# Altium PCB B5PLMF_MAR_HF_B9.PcbDoc
Units mm, origin at the board's own origin, x right, y up, seen from the top; angles counter-clockwise.
Board outline 90.17 x 78.5 mm, 2 copper layers (Top Layer, Bottom Layer), stack 1.671 mm thick; 35 components, 50 nets, 217 pads, 14 vias.
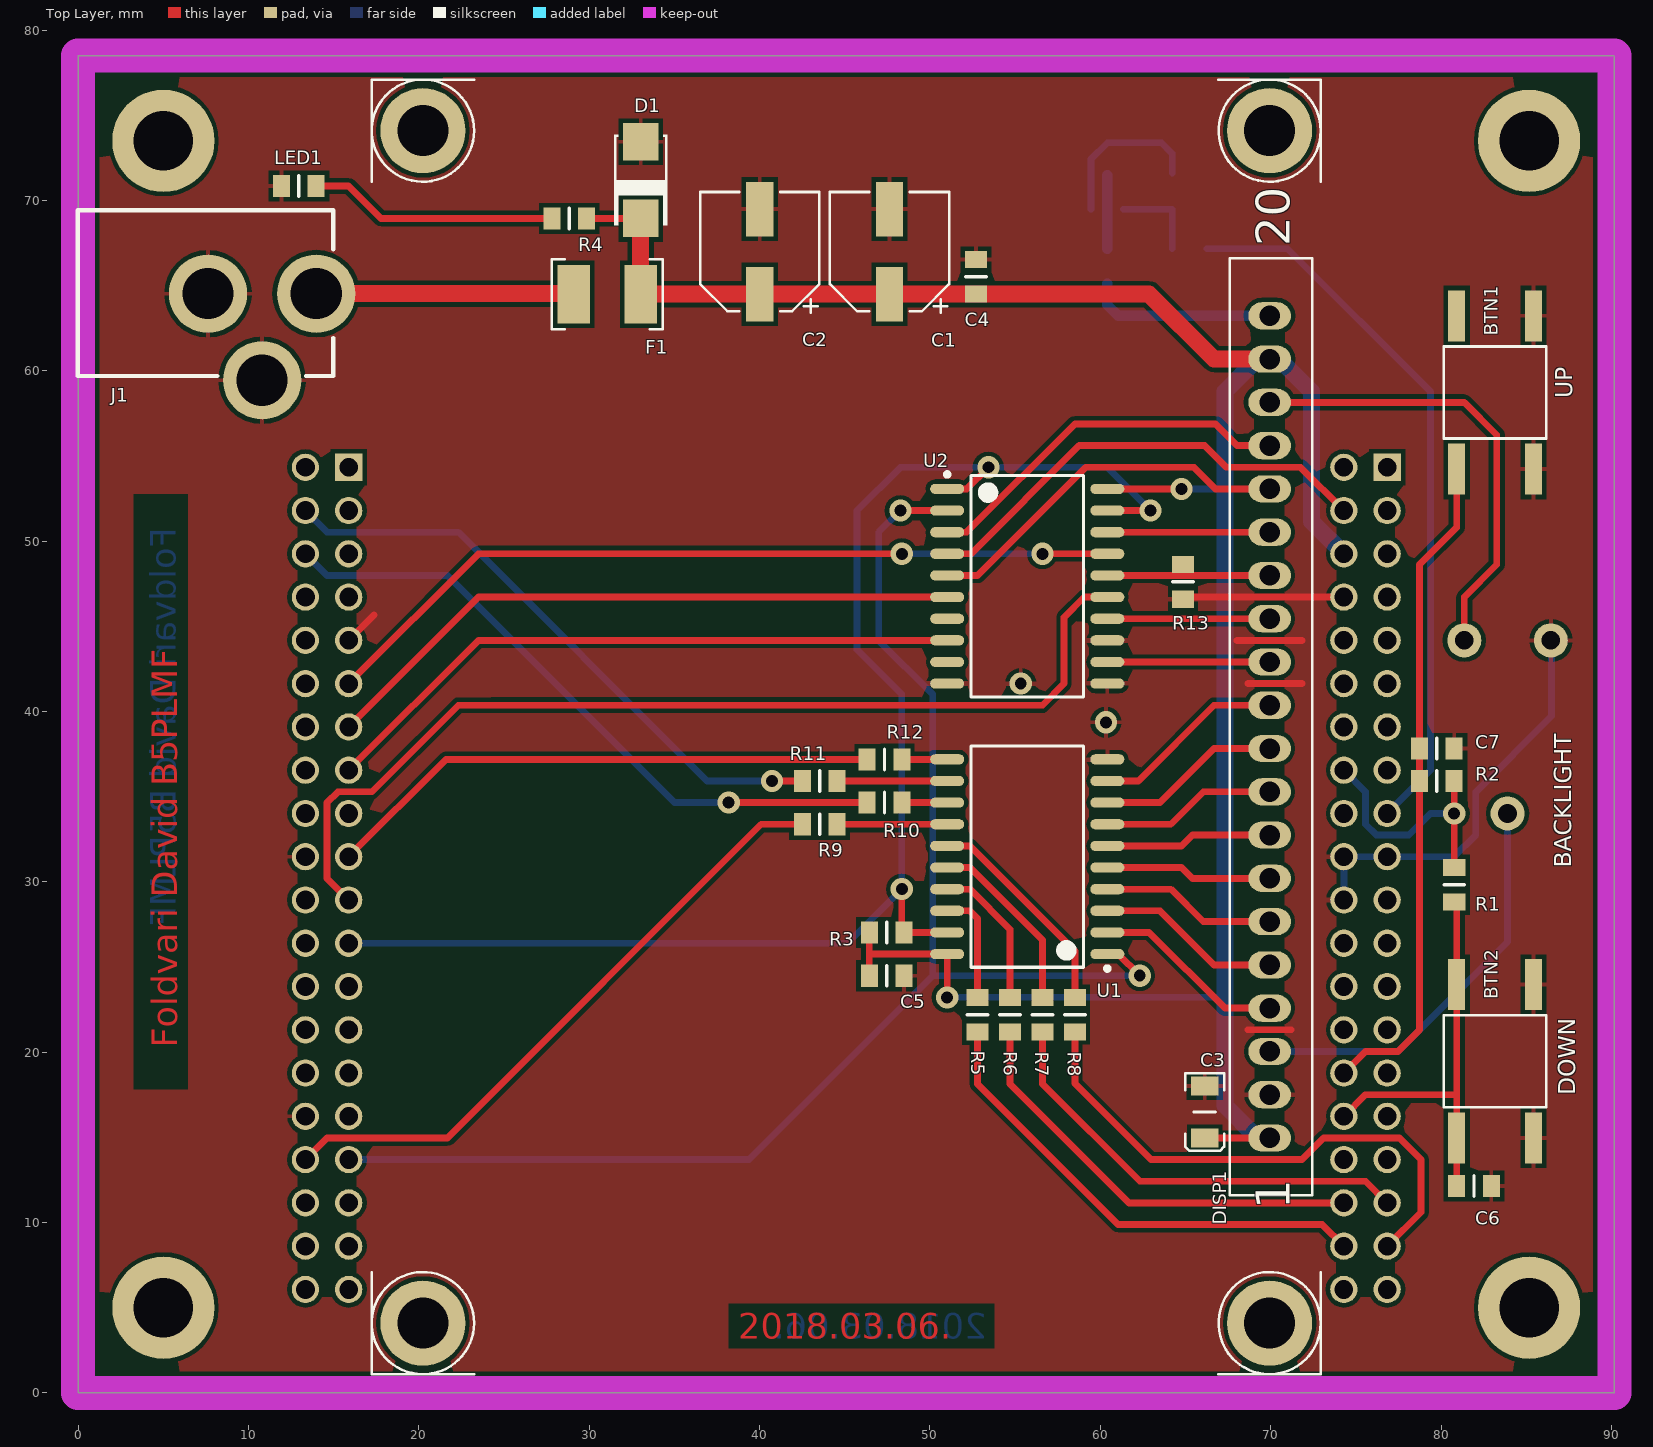
[diagram p0: Top Layer view]
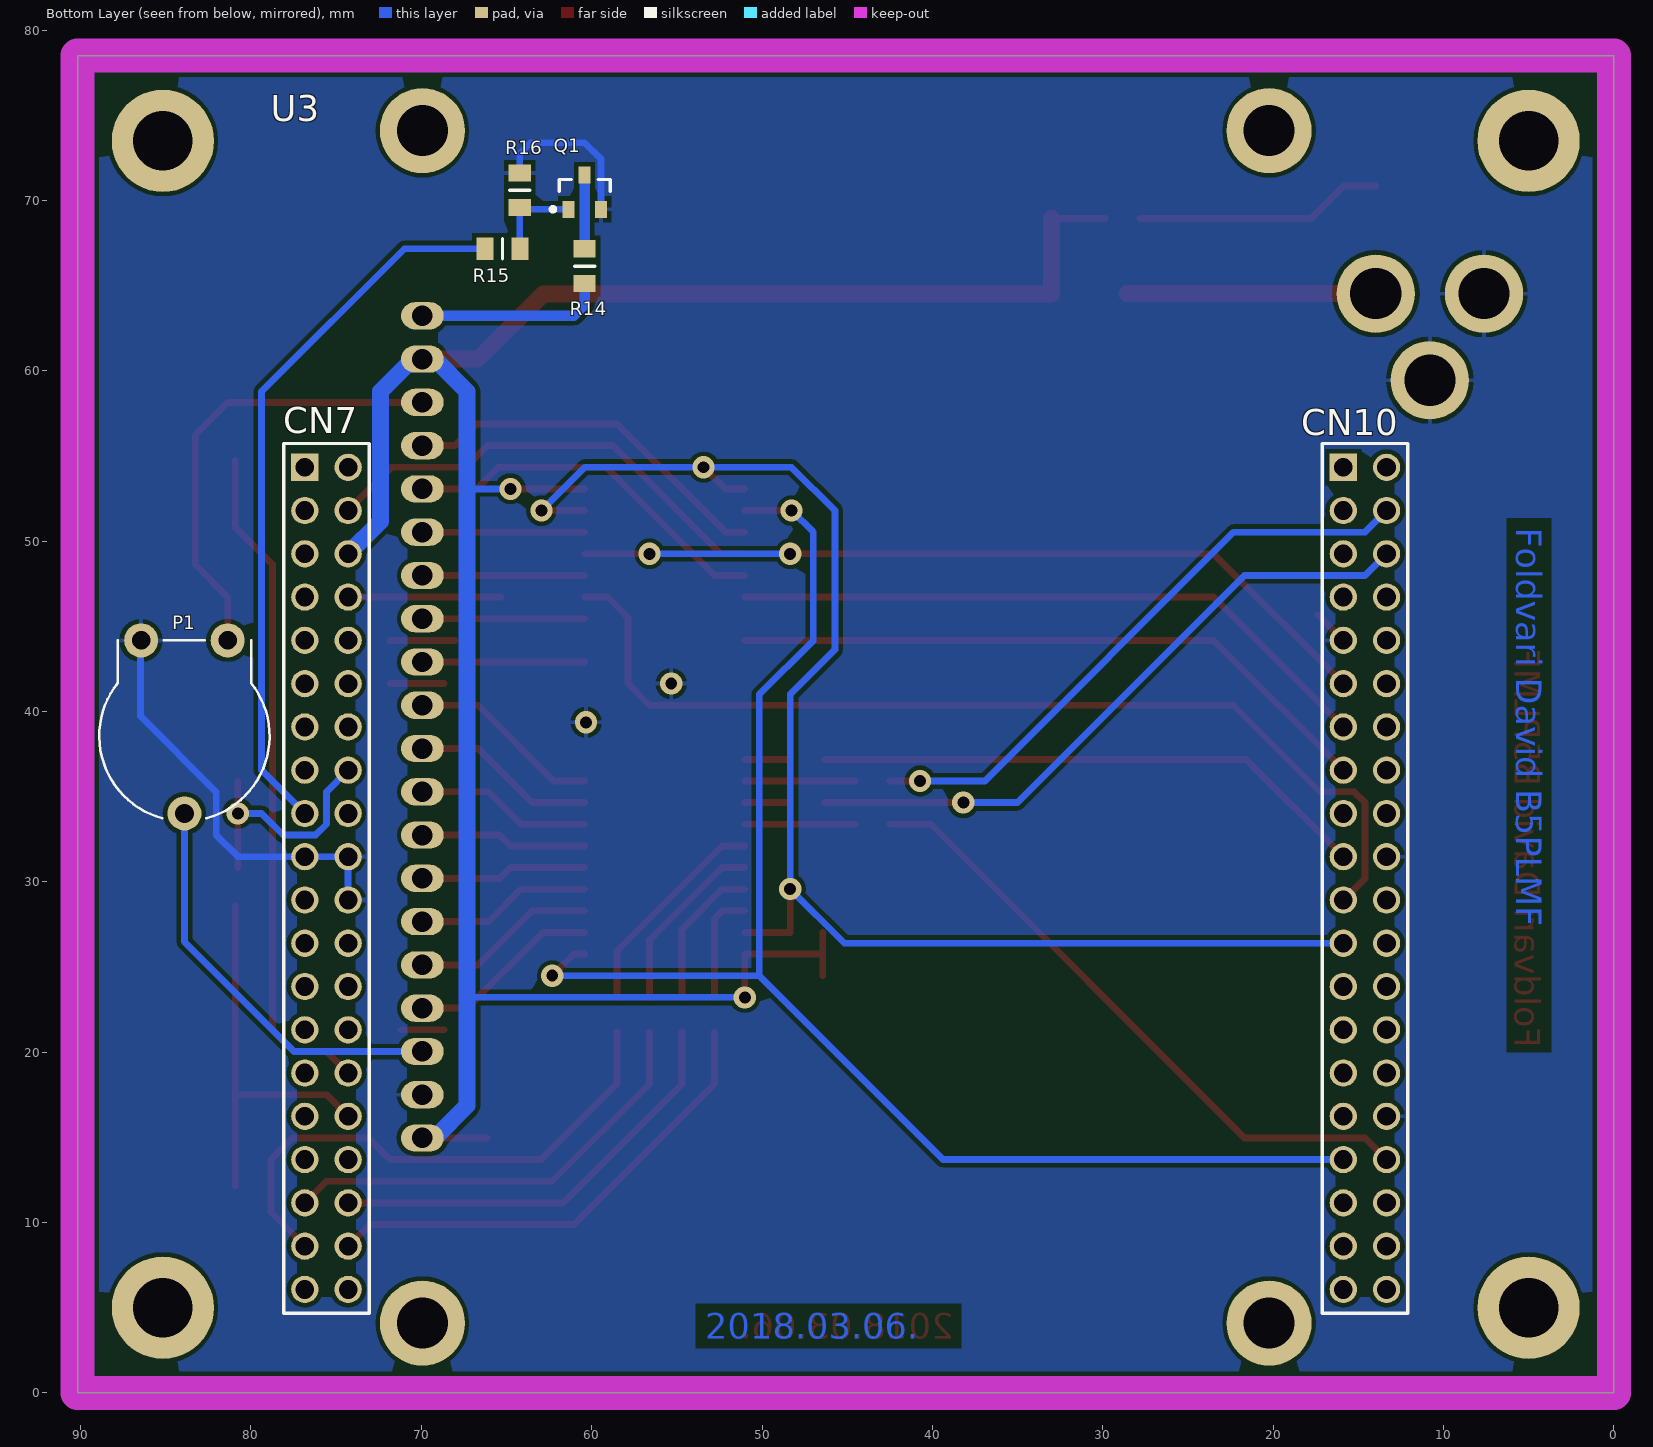
[diagram p1: Bottom Layer view, seen from below]

## Layer stack, top to bottom
Top Solder: solder mask 0.0102, Solder Resist, Dk 3.5
Top Layer: signal copper 0.0356
Dielectric 1: dielectric 1.6, FR-4, Dk 4.8
Bottom Layer: signal copper 0.0356
Bottom Solder: solder mask 0.0102, Solder Resist, Dk 3.5

## Board outline
0,0 0,78.5 90.17,78.5 90.17,0

## Design rules (kind name [scope] priority, off if disabled: settings)
Clearance [All] p1: gap=0.254 ignorepadtopadclearanceinfootprint=FALSE except(0: Arc-Hole Track-Hole SMDPad-Hole THPad-Hole Via-Hole Fill-Hole Poly-Hole Region-Hole Text-Hole)
HoleSize [All] p1: absolutevalues=TRUE maxlimit=4 minlimit=0.025 maxpercent=80.000 minpercent=20.000
PolygonConnect [All] p1: connectstyle=Relief reliefconductorwidth=0.254 reliefentries=4 polygonreliefangle="90 Angle" airgapwidth=0.254
RoutingVias [All] p1: holewidth=0.711 width=1.27 viastyle="Through Hole" minholewidth=0.711 minwidth=1.27 maxholewidth=0.711 maxwidth=1.27
SolderMaskExpansion [All] p1: expansion=0.102
Width [All] p1: maxlimit=10 minlimit=0.254 preferedwidth=0.4 minimp=50.000000 maximp=50.000000 favimp=50.000000
29 further rules are at their usual default settings.

## Classes and differential pairs
net class D[0..7]: D0 D1 D2 D3 D4 D5 D6 D7

## Components (designator, comment, footprint, x,y, rotation, side; value= is the part's Value field where it differs from the comment)
BTN1 "UP" PBUTTON_SMD 83.17,58.73 r90 top locked
BTN2 "DOWN" PBUTTON_SMD 83.17,19.47 r90 top locked
C1 "100u" "D8 ELKO" 47.625,67 r270 top
C2 "100u" "D8 ELKO" 40.005,67 r270 top
C3 "10u" "CAP 1210" 66.125,18.018 r270 top
C4 "100n" "CAP 0805" 52.705,65.516 r270 top
C5 "100n" "CAP 0805" 47.456,24.495 r180 top
C6 "100n" "CAP 0805" 81.936,12.155 r180 top
C7 "100n" "CAP 0805" 79.756,37.83 r180 top
D1 "6.7V" DO-214AC 33.02,71.195 r270 top
DISP1 "64x128 GLCD" 64128Q 46.085,39.1 r90 top locked
F1 "500mA" FUSE1812 31.052,64.5 r0 top
J1 "DC IN 7-12V" "DC POWER CONNECTOR" 13.97,64.53 r90 top locked
LED1 "GREEN" "LED 0805G" 12.954,70.85 r180 top
P1 "10k" PT10 83.905,39.1 r0 bottom locked
Q1 "PMBF170" SOT23 60.41,70.485 r180 bottom
R1 "10k" "RES 0805" 80.772,29.829 r90 top
R2 "10k" "RES 0805" 79.756,35.925 r0 top
R3 "100k" "RES 0805" 47.456,27.035 r180 top
R4 "470R" "RES 0805" 28.829,68.945 r0 top
R5 "1k" "RES 0805" 52.79,22.209 r270 top
R6 "1k" "RES 0805" 54.695,22.209 r270 top
R7 "1k" "RES 0805" 56.6,22.209 r270 top
R8 "1k" "RES 0805" 58.505,22.209 r270 top
R9 "1k" "RES 0805" 43.519,33.385 r180 top
R10 "1k" "RES 0805" 47.329,34.655 r180 top
R11 "1k" "RES 0805" 43.519,35.925 r180 top
R12 "1k" "RES 0805" 47.329,37.195 r180 top
R13 "10k" "RES 0805" 64.855,47.609 r90 top
R14 "33R" "RES 0805" 60.41,66.151 r270 bottom
R15 "4k7" "RES 0805" 65.236,67.167 r0 bottom
R16 "10k" "RES 0805" 64.22,70.596 r270 bottom
U1 "74HCT245D" SO20 55.71,31.48 r180 top
U2 "74HCT244D" SO20 55.71,47.355 r0 top locked
U3 "NUCLEO-F446RE" STM32F4xx_Nucleo 45.085,30.21 r180 bottom locked value="STM32F4 NUCLEO"

## Footprints (in the part's own frame and the unit in brackets; to place one, negate y for a bottom-side part, rotate by r counter-clockwise, add the part's x,y. Pads: shape width x height; smd on the part's side, far side on the other; paste and mask are expansions set on the pad)
64128Q [mm] "64x128 pixel graphical LCD display"
  oval 1.6x2.5 hole 1.2: 1(-24.13,-23.85) 2(-21.59,-23.85) 3(-19.05,-23.85) 4(-16.51,-23.85) 5(-13.97,-23.85) 6(-11.43,-23.85) 7(-8.89,-23.85) 8(-6.35,-23.85) 9(-3.81,-23.85) 10(-1.27,-23.85) 11(1.27,-23.85) 12(3.81,-23.85) 13(6.35,-23.85) 14(8.89,-23.85) 15(11.43,-23.85) 16(13.97,-23.85) 17(16.51,-23.85) 18(19.05,-23.85) 19(21.59,-23.85) 20(24.13,-23.85)
  round 5 hole 3: ""(-35,-23.85) ""(-35,25.85) ""(35,-23.85) ""(35,25.85)
  silkscreen extent -38,-26.85 38,28.85, body extent -38,-26.85 38,28.85, height 15.9
"CAP 0805" [mm] "0805 CAPACITOR"
  rect 1x1.3 smd: 1(-1.016,0) 2(1.016,0)
  silkscreen extent 0,-0.6 0,0.6, body extent -1,-0.64 1,0.62, height 0.6
"CAP 1210" [mm] "POLARIZED CAPACITOR"
  rect 1.1x1.6 smd: 1(3.048,0) 2(0,0)
  silkscreen extent -0.76,-1.14 3.81,1.14, body extent -0.17,-0.8 3.22,0.8, height 1.65
"D8 ELKO" [mm] "D8 size electrolit capacitor 6.3mmx7.7mm"
  rect 3.2x1.6 smd: 1(2.5,0) 2(-2.5,0)
  silkscreen extent -3.5,-3.5 3.6,3.5, body extent -3.5,-3.3 3.5,3.3, height 7.7
"DC POWER CONNECTOR" [mm] "DC POWER CONNECTOR 5.5/2.1/9.5mm"
  round 4.6 hole 3: 1(0,0) 2(0,6.35) 3(-5.08,3.175)
  silkscreen extent -4.84,-1 4.9,14, body extent -4.84,-0.78 4.64,13.7, height 11.18
DO-214AC [mm] "SMA DO-214AC"
  rect 2.2x2.1 smd: 1(-2.25,0) 2(2.25,0)
  silkscreen extent -2.67,-1.58 2.67,1.58, body extent -2.6,-1.3 2.6,1.3, height 2.42
FUSE1812 [mil] "Multifuse"
  rect 75x135 smd: 1(-77.5,0) 2(77.5,0)
  silkscreen extent -128,-81 128,81, body extent -93,-67 93,67, height 53
"LED 0805G" [mm] "0805 GREEN LED"
  rect 1x1.3 smd: 1(-1.016,0) 2(1.016,0)
  silkscreen extent 0,-0.6 0,0.6, body extent -1.01,-0.62 1.01,0.63, height 1.1
PBUTTON_SMD [mm]
  rect 3x1 smd: 1(-4.5,-2.25) 1(4.5,-2.25) 2(-4.5,2.25) 2(4.5,2.25)
  silkscreen extent -2.7,-3 2.7,3, body extent -5,-3 5,3, height 4.95
PT10 [mm] "10mm horizontal potentiometer"
  round 2 hole 1.1: 1(-2.54,-5.08) 2(2.54,-5.08) 3(0,5.08)
  silkscreen extent -5,-5.08 5,5.36, body extent -5.15,-5.07 5.15,5.53, height 6.26
"RES 0805" [mm] "0805 Resistor"
  rect 1x1.3 smd: 1(-1.016,0) 2(1.016,0)
  silkscreen extent 0,-0.6 0,0.6, body extent -1,-0.64 1,0.62, height 0.6
SO20 [mm]
  oval 2x0.6 smd: 1(-4.7,5.715) 2(-4.7,4.445) 3(-4.7,3.175) 4(-4.7,1.905) 5(-4.7,0.635) 6(-4.7,-0.635) 7(-4.7,-1.905) 8(-4.7,-3.175) 9(-4.7,-4.445) 10(-4.7,-5.715) 11(4.7,-5.715) 12(4.7,-4.445) 13(4.7,-3.175) 14(4.7,-1.905) 15(4.7,-0.635) 16(4.7,0.635) 17(4.7,1.905) 18(4.7,3.175) 19(4.7,4.445) 20(4.7,5.715)
  silkscreen extent -4.82,-6.5 3.3,6.69, body extent -5.15,-6.4 5.15,6.4, height 2.7
SOT23 [mm]
  rect 0.7x1 smd: 1(-0.95,-1) 2(0.95,-1) 3(0,1)
  silkscreen extent -1.99,-1.12 1.5,0.75, body extent -1.5,-1.25 1.5,1.25, height 1.09
STM32F4xx_Nucleo [mm] "STM32F4xx Nucleo board"
  round 1.6 hole 1.1: 0(-31.75,-24.13) 0(-29.21,-24.13) 0(29.21,-24.13) 0(31.75,-24.13) 2(-29.21,24.13) 3(-31.75,21.59) 4(-29.21,21.59) 5(-31.75,19.05) 6(-29.21,19.05) 7(-31.75,16.51) 8(-29.21,16.51) 9(-31.75,13.97) 10(-29.21,13.97) 11(-31.75,11.43) 12(-29.21,11.43) 13(-31.75,8.89) 14(-29.21,8.89) 15(-31.75,6.35) 16(-29.21,6.35) 17(-31.75,3.81) 18(-29.21,3.81) 19(-31.75,1.27) 20(-29.21,1.27) 21(-31.75,-1.27) 22(-29.21,-1.27) 23(-31.75,-3.81) 24(-29.21,-3.81) 25(-31.75,-6.35) 26(-29.21,-6.35) 27(-31.75,-8.89) 28(-29.21,-8.89) 29(-31.75,-11.43) 30(-29.21,-11.43) 31(-31.75,-13.97) 32(-29.21,-13.97) 33(-31.75,-16.51) 34(-29.21,-16.51) 35(-31.75,-19.05) 36(-29.21,-19.05) 37(-31.75,-21.59) 38(-29.21,-21.59) 40(31.75,24.13) 41(29.21,21.59) 42(31.75,21.59) 43(29.21,19.05) 44(31.75,19.05) 45(29.21,16.51) 46(31.75,16.51) 47(29.21,13.97) 48(31.75,13.97) 49(29.21,11.43) 50(31.75,11.43) 51(29.21,8.89) 52(31.75,8.89) 53(29.21,6.35) 54(31.75,6.35) 55(29.21,3.81) 56(31.75,3.81) 57(29.21,1.27) 58(31.75,1.27) 59(29.21,-1.27) 60(31.75,-1.27) 61(29.21,-3.81) 62(31.75,-3.81) 63(29.21,-6.35) 64(31.75,-6.35) 65(29.21,-8.89) 66(31.75,-8.89) 67(29.21,-11.43) 68(31.75,-11.43) 69(29.21,-13.97) 70(31.75,-13.97) 71(29.21,-16.51) 72(31.75,-16.51) 73(29.21,-19.05) 74(31.75,-19.05) 75(29.21,-21.59) 76(31.75,-21.59)
  rect 1.6x1.6 hole 1.1: 1(-31.75,24.13) 39(29.21,24.13)
  silkscreen extent -32.98,-25.52 32.98,25.53, body extent -32.98,-25.52 32.98,25.53, height 8.5

## Part data
BTN1 BTN2: library part PUSHBUTTON, "Tactile push button", Reference=45-05-43, Supplier=LOMEX
C1 C2 C3: library part CAP_POL, "POLARIZED CAPACITOR", Supplier=LOMEX
  C1 C2: Reference=91-00-90
  C3: Reference=92-01-13
C4 C5 C6 C7: library part CAP, "NON POLARIZED CAPACITOR", Reference=82-01-25, Supplier=LOMEX
D1: library part "SUPRESSOR DIODE", "SUPRESSOR DIODE", Reference=96-00-75, Supplier=LOMEX
DISP1: library part 64128QCCBW-3LP, "64x128 pixel graphical LCD display from Displaytech", Reference=37-00-71, Supplier=LOMEX
F1: library part FUSE, "FUSE", Reference=44-02-32, Supplier=LOMEX
J1: library part "DC POWER CONN", "DC POWER CONNECTOR 5.5/2.1/9.5mm", Reference=43-07-67, Supplier=LOMEX
LED1: library part LED, "LED", Reference=95-01-09, Supplier=LOMEX
P1: library part POT, "RESISTOR", Reference=05-07-33, Supplier=LOMEX
Q1: "N-Channel MOSFET", Reference=86-01-96, Supplier=LOMEX
R1 R2 R3 R4 R5 R6 R7 R8 R9 R10 R11 R12 R13 R14 R15 R16: library part RES, "RESISTOR", Supplier=LOMEX
  R1 R2 R13 R16: Reference=81-10-99
  R3: Reference=81-11-11
  R4: Reference=81-10-83
  R5 R6 R7 R8 R9 R10 R11 R12: Reference=81-10-87
  R14: Reference=81-28-06
  R15: Reference=81-28-05
U1: library part 74HCT245, "8x Bidirectional bus transciever", Name="74HCT245D  Transceiver, 74HCT245", Reference=1085315, Supplier=Farnell
U2: "8xBuffer/Line Driver", Name="74HCT244D-Q100,118  Buffer / Line Driver, 74HCT244", Reference=2444943, Supplier=Farnell
U3: "STM32F4xx Nucleo board", Name="Nucleo F446RE", Reference=NUCLEO, Supplier=Tanszék

## Free pads (board coordinates)
  round 6 hole 3.5: ""(5,73.5) ""(5,5) ""(85.17,5) ""(85.17,73.5)

## Via types
v1: diameter 1.3/1.3 (per signal layer), hole 0.7, Top Layer to Bottom Layer, 14 vias

## Nets (pads, with @x,y where several pads share a name; then routed paths per layer and width w, separated by ;. In a path a pad name is that pad's centre, name@x,y a point inside that pad or via, vN(x,y) a via of type N, cw(c..) or ccw(c..) an arc to the next point about the centre after c; other vN are vias at no path point)
+3.3V: R1.2 R2.2 U3.16 | length 14.7
  Top Layer w0.4: R1.2 v1(80.772,34.02) R2.2
  Bottom Layer w0.4: U3.16 75.565,35.29 75.565,33.385 76.2,32.75 78.105,32.75 79.375,34.02 v1@80.645,34.02
+5V: C1.1 C2.1 C3.1 C4.2 C5.2 D1.2 DISP1.1 DISP1.19 F1.2 R3.2 R4.2 U1.20 U2.20 U3.6 | length 145.6
  Top Layer w0.4: R4.2 D1.2 ; C5.2 46.44,25.765 ; R3.2 46.44,25.765 ; v1(51.01,23.225) U1.20 46.44,25.765 ; U2.20 v1(64.77,53.07) ; C3.1 DISP1.1
  Top Layer w1: D1.2 F1.2 C2.1 C1.1 C4.2 62.865,64.5 66.675,60.69 DISP1.19
  Bottom Layer w0.4: v1(51.01,23.225) 67.31,23.225 ; v1(64.77,53.07) 67.31,53.07 ; DISP1.1@69.215,14.97 DISP1.1
  Bottom Layer w0.7: DISP1.1 DISP1.1@70.485,14.97
  Bottom Layer w1: DISP1.1@69.215,14.97 67.31,16.875 67.31,23.225 67.31,53.07 67.31,58.785 69.215,60.69 DISP1.19 70.485,60.69 72.39,58.785 72.39,51.165 U3.6
CS1: U2.8 U3.53 | length 38.3
  Top Layer w0.4: U3.53 23.495,44.18 U2.8
CS2: U2.6 U3.51 | length 38.3
  Top Layer w0.4: U3.51 23.495,46.72 U2.6
D0: DISP1.4 U1.2 | length 11.4
  Top Layer w0.4: U1.2 62.865,27.035 67.31,22.59 DISP1.4
D1: DISP1.5 U1.3 | length 10.8
  Top Layer w0.4: U1.3 63.5,28.305 66.675,25.13 DISP1.5
D2: DISP1.6 U1.4 | length 10.3
  Top Layer w0.4: U1.4 64.135,29.575 66.04,27.67 DISP1.6
D3: DISP1.7 U1.5 | length 9.8
  Top Layer w0.4: U1.5 64.77,30.845 65.405,30.21 DISP1.7
D4: DISP1.8 U1.6 | length 9.8
  Top Layer w0.4: U1.6 64.77,32.115 65.405,32.75 DISP1.8
D5: DISP1.9 U1.7 | length 10.3
  Top Layer w0.4: U1.7 64.135,33.385 66.04,35.29 DISP1.9
D6: DISP1.10 U1.8 | length 10.8
  Top Layer w0.4: U1.8 63.5,34.655 66.675,37.83 DISP1.10
D7: DISP1.11 U1.9 | length 11.4
  Top Layer w0.4: U1.9 62.23,35.925 66.675,40.37 DISP1.11
D/I: U2.15 U3.59 | length 59.3
  Top Layer w0.4: U3.59 14.605,30.21 14.605,34.655 15.24,35.29 17.23,35.29 22.31,40.37 24.215,40.37 56.6,40.37 57.87,41.64 57.87,45.535 59.055,46.72 U2.15
DB0: R5.2 U3.38 | length 28.5
  Top Layer w0.4: R5.2 52.79,18.145 61.045,9.89 73.025,9.89 U3.38
DB1: R6.2 U3.36 | length 25.5
  Top Layer w0.4: R6.2 54.695,18.145 61.68,11.16 U3.36
DB2: R7.2 U3.35 | length 26.2
  Top Layer w0.4: R7.2 56.6,18.145 62.315,12.43 75.565,12.43 U3.35
DB3: R8.2 U3.37 | length 32.2
  Top Layer w0.4: R8.2 58.505,18.164 62.969,13.7 71.84,13.7 73.11,14.97 77.555,14.97 78.825,13.7 78.825,10.61 U3.37
DB4: R9.2 U3.72 | length 37.3
  Top Layer w0.4: U3.72 14.605,14.97 21.675,14.97 40.09,33.385 R9.2
DB5: R10.2 U3.44 | length 39
  Top Layer w0.4: v1(38.185,34.655) R10.2
  Bottom Layer w0.4: U3.44 14.605,47.99 21.675,47.99 35.01,34.655 v1(38.185,34.655)
DB6: R11.2 U3.42 | length 35.7
  Top Layer w0.4: v1(40.725,35.925) R11.2
  Bottom Layer w0.4: U3.42 14.605,50.53 22.31,50.53 36.915,35.925 v1(40.725,35.925)
DB7: R12.2 U3.57 | length 32.8
  Top Layer w0.4: U3.57 21.59,37.195 R12.2
DOWN: BTN2.2 C6.2 R1.1 U3.32 | length 23.6
  Top Layer w0.4: U3.32 75.565,17.51 80.92,17.51 ; C6.2 80.92,14.97 80.92,17.51 ; R1.1@80.92,28.58 80.92,23.97 80.92,17.51
E: U2.17 U3.49 | length 47.7
  Top Layer w0.4: U3.49 23.495,49.26 v1(48.345,49.26) ; v1(56.6,49.26) U2.17
  Bottom Layer w0.4: v1(48.345,49.26) v1(56.6,49.26)
GND: BTN1.1 BTN2.1 C1.2 C2.2 C3.2 C4.1 C5.1 C6.1 C7.1 D1.1 DISP1.2 J1.2 J1.3 LED1.2 P1.2 Q1.2 R13.1 R16.1 U1.10 U2.10 U2.11 U2.13 U3.8 U3.19 U3.20 U3.22 U3.47 U3.58 U3.70 | length 54.2
  Top Layer w0.4: U3.47 17.36,45.665 ; R13.1@65.31,46.72 U3.8 ; 68.03,44.18 71.84,44.18 ; 68.665,21.32 71.205,21.32 ; 68.665,41.64 71.84,41.64
  Bottom Layer w0.4: Q1.2 59.46,69.58 59.46,72.44 60.41,73.39 63.585,73.39 64.22,72.755 R16.1 ; U3.22 U3.20 U3.19 80.772,31.48 82.042,32.75 82.042,35.29 86.487,39.735 86.487,44.138 P1.2
  other v1: 60.325,39.37 55.33,41.64
LCD_CS1: DISP1.12 U2.12 | length 9.5
  Top Layer w0.4: U2.12 DISP1.12
LCD_CS2: DISP1.13 U2.14 | length 9.5
  Top Layer w0.4: U2.14 DISP1.13
LCD_D/I: DISP1.16 U2.5 | length 22.1
  Top Layer w0.4: U2.5 52.79,47.99 59.14,54.34 65.49,54.34 66.76,53.07 DISP1.16
LCD_E: DISP1.17 U2.3 | length 22.1
  Top Layer w0.4: U2.3 52.155,50.53 58.505,56.88 66.76,56.88 68.03,55.61 DISP1.17
LCD_R/W: DISP1.15 U2.18 | length 9.5
  Top Layer w0.4: U2.18 DISP1.15
LCD_RST: DISP1.14 R13.2 U2.16 | length 9.5
  Top Layer w0.4: U2.16 64.77,47.99 DISP1.14
NetDISP1_3: DISP1.3 P1.3 | length 24.2
  Bottom Layer w0.4: DISP1.3 77.47,20.05 83.905,26.485 P1.3
NetDISP1_18: DISP1.18 P1.1 | length 27
  Top Layer w0.4: DISP1.18 81.365,58.15 83.27,56.245 83.27,48.625 81.365,46.72 P1.1
NetDISP1_20: DISP1.20 R14.2 | length 11.1
  Bottom Layer w0.6: R14.2 60.41,63.865 61.045,63.23 DISP1.20
NetF1_1: F1.1 J1.1 | length 14.6
  Top Layer w1: J1.1 F1.1@28.575,64.53
NetLED1_1: LED1.1 R4.1 | length 14.6
  Top Layer w0.4: LED1.1 15.875,70.85 17.78,68.945 R4.1
NetQ1_1: Q1.1 R15.1 R16.2 | length 5.2
  Bottom Layer w0.4: Q1.1 64.22,69.485 R15.1
NetQ1_3: Q1.3 R14.1 | length 4.3
  Bottom Layer w0.6: R14.1 Q1.3
NetR5_1: R5.1 U1.18 | length 6.6
  Top Layer w0.4: U1.18 52.34,28.305 52.79,27.855 R5.1
NetR6_1: R6.1 U1.17 | length 8.7
  Top Layer w0.4: U1.17 52.34,29.575 54.695,27.22 R6.1
NetR7_1: R7.1 U1.16 | length 10.7
  Top Layer w0.4: U1.16 52.34,30.845 56.6,26.585 R7.1
NetR8_1: R8.1 U1.15 | length 12.8
  Top Layer w0.4: U1.15 52.34,32.115 58.505,25.95 R8.1
NetR9_1: R9.1 U1.14 | length 6.5
  Top Layer w0.4: R9.1 U1.14
NetR10_1: R10.1 U1.13 | length 2.7
  Top Layer w0.4: R10.1 U1.13
NetR11_1: R11.1 U1.12 | length 6.5
  Top Layer w0.4: R11.1 U1.12
NetR12_1: R12.1 U1.11 | length 2.7
  Top Layer w0.4: R12.1 U1.11
PWM: R15.2 U3.17 | length 42.4
  Bottom Layer w0.4: R15.2 70.993,67.167 79.375,58.785 79.375,36.56 U3.17
R/W: U1.1 U2.2 U3.71 | length 85.2
  Top Layer w0.4: v1(48.26,51.8) U2.2 ; U1.1 61.045,25.765 v1(62.315,24.495)
  Bottom Layer w0.4: U3.71 39.37,13.7 50.165,24.495 ; v1(48.26,51.8) 46.99,50.53 46.99,44.18 50.165,41.005 50.165,24.495 ; v1(62.315,24.495) 50.165,24.495
RST: U2.4 U3.4 | length 27.5
  Top Layer w0.4: U2.4 52.409,49.26 58.759,55.61 66.125,55.61 67.395,54.34 71.755,54.34 U3.4
UP: BTN1.2@80.92,54.23 C7.2 R2.1 U3.30 | length 39.8
  Top Layer w0.4: U3.30 75.565,20.05 77.47,20.05 78.74,21.32 R2.1 C7.2 78.74,48.625 80.92,50.805 80.92,54.23 BTN1.2@80.92,54.75
~LCD_EN: R3.1 U1.19 U2.1 U2.19 U3.61 | length 87
  Top Layer w0.4: R3.1@48.345,27.035 v1(48.345,29.575) ; R3.1 U1.19 ; U2.1 52.155,53.07 v1(53.425,54.34) ; U2.19 v1(62.95,51.8)
  Bottom Layer w0.4: U3.61 45.17,26.4 v1(48.345,29.575) 48.345,41.005 45.72,43.63 45.72,51.8 48.26,54.34 v1(53.425,54.34) 60.41,54.34 v1(62.95,51.8)
pads on no net: BTN1.2@80.92,63.23 DISP1. U2.7 U2.9 U3.0 U3.1 U3.2 U3.3 U3.5 U3.7 U3.9 U3.10 U3.11 U3.12 U3.13 U3.14 U3.15 U3.18 U3.21 U3.23 U3.24 U3.25 U3.26 U3.27 U3.28 U3.29 U3.31 U3.33 U3.34 U3.39 U3.40 U3.41 U3.43 U3.45 U3.46 U3.48 U3.50 U3.52 U3.54 U3.55 U3.56 U3.60 U3.62 U3.63 U3.64 U3.65 U3.66 U3.67 U3.68 U3.69 U3.73 U3.74 U3.75 U3.76

## Polygon pours and split planes (outlines as drawn)
GND on Bottom Layer "BOTTOM_GND" (solid, remove dead copper, pour order 4): 0,78.5 90.17,78.5 90.17,0 0,0
GND on Top Layer "TOP_GND" (solid, remove dead copper, pour order 0): 0,78.5 90.17,78.5 90.17,0 0,0

## Keep-outs
Keep-Out Layer:
  the board outline again, w2

## Other copper
Top Layer:
  pour cut-out: 6.435,52.753 6.435,17.828 3.26,17.828 3.26,52.753
  region: 3.175,63.765
  region: 2.54,63.765
  text "Foldvari David B5PLMF" at 5.8,20.265 h1.5 r90
  text "2018.03.06." at 38.735,3.175 h1.5
Bottom Layer:
  region: 67.31,63.865
  text "Foldvari David B5PLMF" at 5.715,50.8 h1.5 r90
  text "2018.03.06." at 53.34,3.175 h1.5

## Silkscreen, mask and mechanical layers (free items; w line width, h text height)
Top Overlay:
  pour cut-out: 64.77,72.12
  text "UP" at 87.715,58.404 h1 r90
  text "BACKLIGHT" at 87.63,30.845 h1 r90
  text "DOWN" at 87.867,17.485 h1 r90
Top Solder:
  region: 53.975,2.54 37.782,2.54 37.782,5.715 53.975,5.715
  lines w0.254: 0,0 90.17,0 90.17,78.5 0,78.5 0,0
Bottom Solder:
  region: 53.975,2.54 37.782,2.54 37.782,5.715 53.975,5.715
  region: 6.435,52.753 6.435,17.828 3.26,17.828 3.26,52.753

## Text inside footprints (layer, text, board x,y; h text height)
DISP1: Top Overlay "20" at 71.12,67.31 h2 r90; Top Overlay "1" at 71.12,10.795 h2 r90
U3: Bottom Overlay "CN7" at 78.114,56.347 h1.52; Bottom Overlay "CN10" at 18.348,56.22 h1.52